# Altium PCB RatumnScanner_PcbDoc@20260328.pcbdoc (part 2 of 2)
Units mil, origin at the board's own origin, x right, y up, seen from the top; angles counter-clockwise.
Board outline 3937.01 x 983.86 mil, 6 copper layers (Top Layer, 内层1, 内层2, CONNECTION, IO_PINS, Bottom Layer), stack 62.125 mil thick; 143 components, 128 nets, 581 pads, 302 vias.
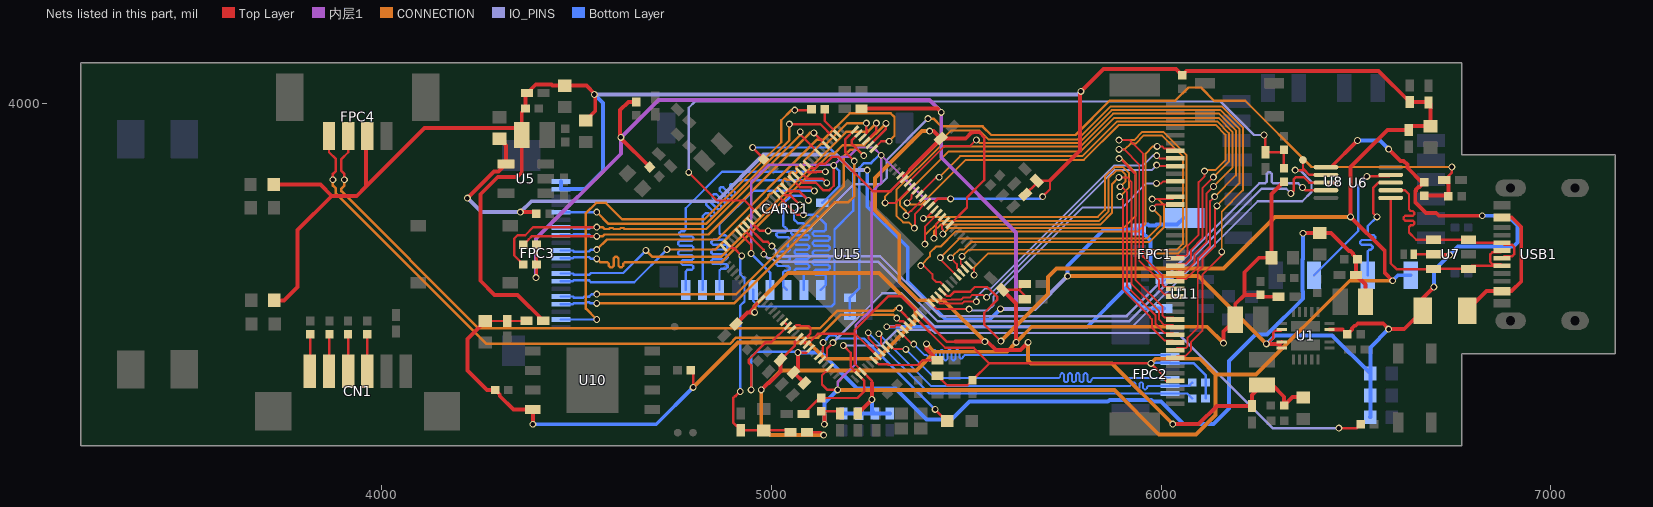
[diagram p5: the nets of this part, all layers, seen from the top]

## Via types
v1: diameter 17.72, hole 11.81, Top Layer to Bottom Layer, 302 vias

## Nets (pads, with @x,y where several pads share a name; then routed paths per layer and width w, separated by ;. In a path a pad name is that pad's centre, name@x,y a point inside that pad or via, vN(x,y) a via of type N, cw(c..) or ccw(c..) an arc to the next point about the centre after c; other vN are vias at no path point) (continued)
LCD_D4: FPC1.14 U15.92 | length 779.4
  Top Layer w5: v1(5433.52,3605.62) 5433.52,3600.95 U15.92@5477.19,3557.29 ; v1(5977.8,3731.76) 5987.92,3741.87 FPC1.14@6035.79,3741.87
  CONNECTION w5: v1(5433.52,3605.62) 5482,3654.09 5962.84,3654.09 5998.98,3690.23 5998.98,3710.58 v1(5977.8,3731.76)
LCD_D5: FPC1.13 U15.93 | length 784.4
  Top Layer w5: v1(5459.96,3605) 5476.21,3588.76 5476.21,3579.79 5486.93,3569.06 U15.93@5486.93,3567.03 ; v1(5977.12,3755.61) 6008,3755.61 6008.66,3756.26 6030.48,3756.26 FPC1.13@6035.79,3761.57
  CONNECTION w5: v1(5459.96,3605) 5464.94,3609.99 5465.85,3609.99 5482.01,3626.14 5493.79,3626.14 5512.72,3645.08 5969.08,3645.08 6008,3684 6008,3740 5992.39,3755.61 v1(5977.12,3755.61)
LCD_D6: FPC1.26 U15.94 | length 1500.6
  Top Layer w5: v1(5489.2,3608.8) 5485.95,3605.55 5485.95,3589.53 5496.67,3578.81 U15.94@5496.67,3576.78 ; v1(5892,3883.04) 5904.96,3883.04 5944,3844 5944,3597.47 5994.67,3546.8 5994.67,3524.97 6008.66,3510.98 6030.48,3510.98 FPC1.26@6035.79,3505.67
  CONNECTION w5: v1(5489.2,3608.8) 5505.97,3625.58 6040.58,3625.58 6055.94,3640.94 6055.94,3865.31 6002.27,3918.98 5955.73,3918.98 5934.48,3897.73 5921.73,3897.73 5907.04,3883.04 v1(5892,3883.04)
LCD_D7: FPC1.25 U15.95 | length 1527
  Top Layer w5: U15.95@5506.42,3586.52 5520.16,3572.78 v1(5520.16,3560.82) ; v1(5892,3906.74) 5919.26,3906.74 5954,3872 5954,3607.17 6003.69,3557.48 6003.69,3535.65 6008.66,3530.68 6030.48,3530.68 FPC1.25@6035.79,3525.37
  CONNECTION w5: v1(5520.16,3560.82) 5520.16,3580.41 5556.31,3616.56 6044.31,3616.56 6064.95,3637.2 6064.95,3869.05 6006,3928 5952,3928 5930.74,3906.74 v1(5892,3906.74)
LCD_D8: FPC1.24 U15.109 | length 1640.6
  Top Layer w5: v1(5367,3681) 5368,3682 5368,3717.16 U15.109@5399.24,3748.4 ; FPC1.24@6035.79,3545.07 6041.1,3550.38 6062.93,3550.38 6094.95,3582.4 6094.95,3604.23 6126,3635.28 6126,3750.66 v1(6137.34,3762)
  CONNECTION w5: v1(5367,3681) 5352.25,3695.75 5338.25,3695.75 5320.98,3713.02 5320.98,3778.98 5432,3890 5792,3890 5877.02,3975.02 6149.23,3975.02 6192.06,3932.19 6192.06,3816.72 v1(6137.34,3762)
LCD_D9: FPC1.23 U15.110 | length 1502.5
  Top Layer w5: v1(5345.43,3713.09) 5357.94,3725.6 5358.98,3725.6 5389.5,3756.11 U15.110@5389.5,3758.14 ; FPC1.23@6035.79,3564.77 6041.05,3570.03 6062.93,3570.03 6085.93,3593.04 6085.93,3614.91 6116,3644.98 6116,3769.47 v1(6134.41,3787.89)
  CONNECTION w5: v1(5345.43,3713.09) 5345.43,3724.45 5330,3739.89 5330,3752.32 5455.68,3878 5794,3878 5880.03,3964.03 6147.47,3964.03 6183.05,3928.45 6183.05,3836.52 v1(6134.41,3787.89)
LCD_D10: FPC1.22 U15.111 | length 1294.7
  Top Layer w5: U15.111@5379.75,3767.89 5423.61,3811.74 v1(5430.26,3811.74) ; FPC1.22@6035.79,3584.42 6041.05,3589.68 6062.93,3589.68 6076.92,3603.67 6076.92,3625.55 6106,3654.63 6106,3784 v1(6134,3812)
  CONNECTION w5: v1(5430.26,3811.74) 5484.53,3866 5798,3866 5887.02,3955.02 6143.73,3955.02 6174.03,3924.72 6174.03,3852.03 v1(6134,3812)
LCD_D11: FPC1.21 U15.112 | length 1351.8
  Top Layer w5: v1(5348.31,3746.1) 5359.29,3757.08 5359.29,3764.87 5370.01,3775.6 U15.112@5370.01,3777.63 ; FPC1.21@6035.79,3604.07 6041.1,3609.38 6062.93,3609.38 6067.9,3614.35 6067.9,3636.18 6096,3664.28 6096,3799.08 6111.43,3814.51 v1(6111.43,3827.47)
  CONNECTION w5: v1(5348.31,3746.1) 5351.9,3746.1 5356,3742 5385.05,3742 5499.05,3856 5802,3856 5892,3946 6140,3946 6165.02,3920.98 6165.02,3855.77 6139.25,3830 6113.96,3830 v1(6111.43,3827.47)
LCD_D12: FPC1.34 U15.113 | length 1834.1
  Top Layer w5: v1(5292,3746) 5318.89,3746 U15.113@5360.27,3787.37 ; FPC1.34@6035.79,3348.17 6041.1,3353.48 6062.93,3353.48 6076.92,3367.47 6076.92,3389.3 6106,3418.38 6106,3562 6155.58,3611.58 v1(6155.58,3620)
  CONNECTION w5: v1(5292,3746) 5292,3762.75 5461.25,3932 5534,3932 5557.97,3908.03 5784.53,3908.03 5869.55,3993.05 6156.7,3993.05 6210.09,3939.66 6210.09,3778.09 6155.58,3723.58 v1(6155.58,3620)
LCD_D13: FPC1.33 U15.114 | length 1604.1
  Top Layer w5: U15.114@5350.52,3797.12 5445.41,3892 5510.66,3892 v1(5526,3907.34) ; FPC1.33@6035.79,3367.87 6041.1,3373.18 6062.93,3373.18 6067.9,3378.15 6067.9,3399.98 6094,3426.08 6094,3568.7 6106,3580.7 6106,3602.53 6138,3634.53 6138,3732.96 v1(6143.34,3738.3)
  CONNECTION w5: v1(5526,3907.34) 5534.33,3899.02 5788.27,3899.02 5873.28,3984.03 6152.97,3984.03 6201.08,3935.92 6201.08,3796.04 v1(6143.34,3738.3)
LCD_D14: FPC1.32 U15.107 | length 1193
  Top Layer w5: v1(5390,3706) 5395.82,3706 U15.107@5418.73,3728.91 ; v1(5894,3762) 5902,3754 5902,3524 5972,3454 5972,3451.37 5976.64,3446.73 5976.64,3424.9 6008.66,3392.88 6030.48,3392.88 FPC1.32@6035.79,3387.57
  CONNECTION w5: v1(5390,3706) 5394,3710 5838,3710 5855.97,3727.97 5855.97,3812.91 5880.72,3837.67 5902.56,3837.67 5918,3822.23 5918,3786 v1(5894,3762)
LCD_D15: FPC1.31 U15.106 | length 1244.9
  Top Layer w5: v1(5394,3640) 5394,3684.69 U15.106@5428.47,3719.17 ; v1(5894.72,3787.25) 5898.75,3787.25 5912,3774 5912,3532 5952,3492 5952,3491.07 5985.66,3457.41 5985.66,3435.59 6008.66,3412.58 6030.48,3412.58 FPC1.31@6035.79,3407.27
  CONNECTION w5: v1(5394,3640) 5394,3662.75 5430.42,3699.17 5840.42,3699.17 5864.98,3723.73 5864.98,3809.18 5884.46,3828.65 5898.83,3828.65 5908.98,3818.49 5908.98,3801.51 v1(5894.72,3787.25)
LCD_D16: FPC1.30 U15.105 | length 1124.8
  Top Layer w5: v1(5417.24,3655.24) 5422.66,3660.66 5422.66,3691.83 5438.22,3707.39 U15.105@5438.22,3709.42 ; v1(5891.64,3811.31) 5912.69,3811.31 5924,3800 5924,3538.77 5994.67,3468.1 5994.67,3446.27 6008.66,3432.28 6030.48,3432.28 FPC1.30@6035.79,3426.97
  CONNECTION w5: v1(5417.24,3655.24) 5417.24,3673.24 5434.16,3690.16 5844.16,3690.16 5874,3720 5874,3793.67 v1(5891.64,3811.31)
LCD_D17: FPC1.29 U15.104 | length 1208
  Top Layer w5: v1(5440,3666) 5440,3677.13 5437.24,3679.89 5437.24,3688.95 U15.104@5447.96,3699.68 ; v1(5892,3859.34) 5894.66,3859.34 5934,3820 5934,3548.47 6003.69,3478.78 6003.69,3456.85 6008.66,3451.88 6030.58,3451.88 FPC1.29@6035.79,3446.67
  CONNECTION w5: v1(5440,3666) 5455.14,3681.14 5903.14,3681.14 5934,3712 5934,3824.75 5899.41,3859.34 v1(5892,3859.34)
LCD_DCLK: FPC1.11 U15.85 | length 785
  Top Layer w5: U15.85@5408.99,3489.09 5424.76,3473.31 v1(5507.57,3473.31) ; v1(5988.17,3795.97) 5999.97,3795.97 6004.97,3800.97 FPC1.11@6035.79,3800.97
  IO_PINS w5: v1(5507.57,3473.31) 5510.88,3470 5556.46,3470 5570,3483.54 5570,3506 5798,3734 5900,3734 5961.97,3795.97 v1(5988.17,3795.97)
LCD_DEN: FPC1.7 U15.89 | length 989.2
  Top Layer w5: v1(5383.25,3584.75) 5391.27,3584.75 5412.89,3563.14 5412.89,3553.05 5423.05,3542.89 5433.14,3542.89 U15.89@5447.96,3528.06 ; v1(5990,3890.77) 6002.87,3890.77 6008.66,3884.98 6030.48,3884.98 FPC1.7@6035.79,3879.67
  CONNECTION w5: v1(5383.25,3584.75) 5406.9,3608.41 5406.9,3617.65 5423.25,3634 5434,3634 5472.13,3672.13 5940.13,3672.13 5960.24,3692.24 5960.24,3747.96 5959.78,3748.42 5959.78,3762.79 5960.24,3763.26 5960.24,3872.24 5978.77,3890.77 v1(5990,3890.77)
LCD_HSYNC: FPC1.9 U15.87 | length 761.2
  Top Layer w5: U15.87@5428.47,3508.58 5430.51,3508.58 5441.23,3497.85 5446.27,3497.85 5446.74,3497.38 5462.24,3497.38 5462.86,3498 5487.25,3498 5492.27,3503.02 5508.61,3503.02 5515.6,3510 5542,3510 5548.13,3503.87 v1(5552.39,3503.87) ; v1(5988.39,3842.93) 5990.94,3840.37 FPC1.9@6035.79,3840.37
  IO_PINS w5: v1(5552.39,3503.87) 5553.87,3503.87 5880,3830 5975.46,3830 v1(5988.39,3842.93)
LCD_VSYNC: FPC1.8 U15.86 | length 788.1
  Top Layer w5: U15.86@5418.73,3498.83 5420.76,3498.83 5431.49,3488.11 5443.89,3488.11 5444,3488 5490,3488 5494.66,3492.66 v1(5526,3492.66) ; v1(5988.77,3867.07) 5995.87,3859.97 FPC1.8@6035.79,3859.97
  IO_PINS w5: v1(5526,3492.66) 5526,3504 5548,3526 5563.25,3526 5876.27,3839.02 5876.94,3839.02 5879.93,3842 5954,3842 5979.07,3867.07 v1(5988.77,3867.07)
MIPI/LVDS_CLK_N: FPC3.8 U15.125 | length 1042.7
  Top Layer w6.18: U15.125@5243.35,3904.29 5269.32,3930.27 v1(5269.32,3950.68)
  CONNECTION w6.18: v1(4678,3624) 4694,3608 4872.04,3608 5192.04,3928 5246.64,3928 v1(5269.32,3950.68)
  Bottom Layer w6.18: FPC3.8@4459.79,3564.66 4490.58,3564.66 4493.34,3561.91 4525.35,3561.91 4526.02,3561.24 4532.2,3561.24 4536.96,3566 4620,3566 v1(4678,3624)
MIPI/LVDS_CLK_P: FPC3.7 U15.126 | length 1041.4
  Top Layer w6.18: U15.126@5233.6,3914.04 5244.92,3925.35 5244.92,3934.07 5243.64,3935.35 v1(5243.64,3950.36)
  CONNECTION w6.18: v1(4732,3626.31) 4856.31,3626.31 4991.29,3761.29 4991.29,3765.18 4996.15,3770.03 5000.03,3770.03 5020.15,3790.15 5026.06,3790.15 5028.89,3792.98 5028.89,3802.78 5033.74,3807.63 5037.63,3807.63 5040.26,3805 5046.44,3805 5049,3807.56 5049,3813.74 5046.37,3816.37 5046.37,3820.26 5051.22,3825.11 5055.11,3825.11 5057.74,3822.48 5063.92,3822.48 5066.48,3825.04 5066.48,3831.22 5063.85,3833.85 5063.85,3837.74 5068.71,3842.6 5072.6,3842.6 5075.22,3839.97 5081.41,3839.97 5083.97,3842.53 5083.97,3853.97 5128,3898 5142,3898 5194.36,3950.36 v1(5243.64,3950.36)
  Bottom Layer w6.18: FPC3.7@4459.79,3544.97 4490.58,3544.97 4493.34,3547.73 4519.48,3547.73 4520.14,3547.06 4532.2,3547.06 4536.96,3542.3 4647.99,3542.3 v1(4732,3626.31)
MIPI/LVDS_D0_N: FPC3.5 U15.127 | length 1064
  Top Layer w6.18: U15.127@5223.86,3923.78 5206,3905.92 5206,3898 v1(5237,3867)
  CONNECTION w6.18: v1(4552,3511.64) 4909.13,3511.64 5186,3788.51 5186,3866 5202,3882 5222,3882 v1(5237,3867)
  Bottom Layer w6.18: FPC3.5@4459.79,3505.6 4490.58,3505.6 4493.33,3502.85 4517.76,3502.85 4520.14,3505.24 4532.2,3505.24 4538.6,3511.64 v1(4552,3511.64)
MIPI/LVDS_D0_P: FPC3.4 U15.128 | length 1060.3
  Top Layer w6.18: v1(5212.59,3853.21) 5190,3875.8 5190,3909.41 U15.128@5214.11,3933.53
  CONNECTION w6.18: v1(4552,3487.94) 4903.94,3487.94 5163.01,3747.01 5197.01,3747.01 5212.59,3762.59 v1(5212.59,3853.21)
  Bottom Layer w6.18: FPC3.4@4459.79,3485.92 4490.58,3485.92 4493.33,3488.68 4523.63,3488.68 4526.02,3491.06 4532.2,3491.06 4535.32,3487.94 v1(4552,3487.94)
MIPI/LVDS_D1_N: FPC3.11 U15.123 | length 1123.5
  Top Layer w6.18: U15.123@5262.83,3884.81 5282.03,3904 v1(5302,3904)
  CONNECTION w6.18: v1(4552,3626) 4578,3652 4861.13,3652 5117.33,3908.2 5133.56,3908.2 5201.36,3976 5306,3976 5316,3966 5316,3918 v1(5302,3904)
  Bottom Layer w6.18: FPC3.11@4459.79,3623.71 4490.58,3623.71 4493.33,3620.96 4519.87,3620.96 4520.14,3621.24 4532.2,3621.24 4536.96,3626 v1(4552,3626)
MIPI/LVDS_D1_P: FPC3.10 U15.124 | length 1123.5
  Top Layer w6.18: U15.124@5253.09,3894.55 5294,3935.46 v1(5294,3950)
  CONNECTION w6.18: v1(4552,3602.3) 4560.3,3594 4578.6,3594 4582.98,3589.63 4582.98,3584.37 4587.35,3580 4590.97,3580 4595.34,3584.37 4595.34,3603.63 4599.71,3608 4603.33,3608 4607.7,3603.63 4607.7,3584.76 4612.07,3580.39 4615.69,3580.39 4620.06,3584.76 4620.06,3589.63 4624.43,3594 4872.46,3594 5150.91,3872.45 5161.71,3872.45 5183.26,3894 5238,3894 v1(5294,3950)
  Bottom Layer w6.18: FPC3.10@4459.79,3604.03 4490.58,3604.03 4493.33,3606.79 4525.74,3606.79 4526.02,3607.06 4532.2,3607.06 4536.96,3602.3 v1(4552,3602.3)
MIPI/LVDS_MCLK0: FPC3.2 R9.2 | length 1134.1
  Top Layer w6.18: v1(5060,3984) 5100.96,3984 R9.2@5102.96,3986
  CONNECTION w6.18: v1(4552,3446.55) 4524,3474.55 4524,3719.51 4550.49,3746 4575,3746 4617,3704 4828,3704 5025.32,3901.32 5025.32,3958.06 5051.26,3984 v1(5060,3984)
  Bottom Layer w6.18: FPC3.2@4459.79,3446.55 v1(4552,3446.55)
MIPI/LVDS_RST: FPC3.16 U15.3 | length 856.7
  Top Layer w6.18: v1(5046,3948) 5125.45,3948 U15.3@5159.41,3914.04
  CONNECTION w6.18: v1(4552,3722.14) 4582.14,3692 4831.81,3692 5046,3906.19 v1(5046,3948)
  Bottom Layer w6.18: FPC3.16@4459.79,3722.14 v1(4552,3722.14)
MIPI_CLK: R9.1 U15.2 | length 75.5
  Top Layer w6.18: R9.1@5137.04,3986 5137.04,3955.9 U15.2@5169.16,3923.78
MIPI_I2C_SCL: FPC3.13 R48.1 U15.5 | length 1004.3
  Top Layer w6.18: v1(5109.12,3925.35) U15.5@5139.92,3894.55
  Top Layer w6.2: R48.1@4363.48,3638.17 4377.34,3652.03 4377.34,3652.56 4382.66,3657.88 4383.19,3657.88 4385.31,3660 v1(4552,3660)
  CONNECTION w6.18: v1(4552,3660) 4567.04,3660 4571.9,3664.86 4838.42,3664.86 5098.91,3925.35 v1(5109.12,3925.35)
  Bottom Layer w6.18: FPC3.13@4459.79,3663.08 4490.58,3663.08 4493.44,3665.94 4519.05,3665.94 4520.13,3664.86 4532.1,3664.86 4536.96,3660 v1(4552,3660)
MIPI_I2C_SDA: FPC3.14 R47.1 U15.7 | length 1104.4
  Top Layer w6.18: v1(5074,3928) 5074,3921.51 U15.7@5120.44,3875.07
  Top Layer w6.2: R47.1@4363.48,3587.97 4340,3611.45 4340,3654 4348.86,3662.86 4368.29,3662.86 4389.14,3683.7 v1(4552,3683.7)
  CONNECTION w6.18: v1(4552,3683.7) 4567.04,3683.7 4571.9,3678.84 4583.35,3678.84 4585.93,3681.42 4593.12,3681.42 4595.71,3678.84 4610.77,3678.84 4613.35,3681.42 4620.54,3681.42 4623.13,3678.84 4833.07,3678.84 5074,3919.77 v1(5074,3928)
  Bottom Layer w6.18: FPC3.14@4459.79,3682.77 4490.58,3682.77 4493.44,3679.92 4524.84,3679.92 4525.92,3678.84 4532.1,3678.84 4536.96,3683.7 v1(4552,3683.7)
NPOR: C6.2 R4.1 R23.1 U15.66 | length 1772.1
  Top Layer w6.2: C6.2@5082.41,3204.4 5123.35,3245.35 R4.1@5127.91,3245.35 5221.35,3245.35 5238,3262 5238,3289.82 U15.66@5223.86,3303.96 5223.86,3305.14 5203.78,3325.22 5203.78,3360.91 v1(5184.75,3379.94) ; v1(6456,3168) 6502.45,3168 R23.1@6512.33,3177.88
  IO_PINS w6.2: v1(5184.75,3379.94) 5281.94,3379.94 5322,3420 5412.45,3420 5420.45,3412 6042,3412 6286,3168 v1(6456,3168)
PWM_LCD: R46.2 U11.4 U15.78 | length 837.4
  Top Layer w6.2: v1(5296,3428) 5316.54,3428 5320.74,3432.2 5329.45,3432.2 U15.78@5340.78,3420.88
  Bottom Layer w10: v1(5296,3428) 5811.04,3428 R46.2@5914,3530.96 5914,3516 5955.29,3474.71 U11.4@6007.49,3474.71
RD+: CN1.2 R43.2 | length 95.7
  Top Layer w6.2: CN1.2@3864.76,3313.67 3866,3314.91 R43.2@3866,3408.83
RD-: CN1.1 R42.2 | length 95.6
  Top Layer w6.2: CN1.1@3815.55,3313.67 3816.49,3314.61 R42.2@3816.49,3408.83
RECOVERY: C8.2 R24.1 R25.1 U15.23 | length 2048.6
  Top Layer w6.18: C8.2@6267.74,3875.66 6308.15,3875.66 R24.1@6315.11,3882.63 R25.1@6315.11,3834.38
  Top Layer w6.2: v1(4788,3824) 4860,3752 4931.71,3752 U15.23@4964.54,3719.17 ; v1(6264,3920) 6267.74,3916.26 C8.2@6267.74,3875.66
  IO_PINS w6.2: v1(4788,3824) 4788,3990 4804,4006 6152,4006 6238,3920 v1(6264,3920)
SDMMC0_CLK: CARD1.5 R10.2 | length 929
  Top Layer w6.18: v1(4952,3888) 4979.95,3860.05 R10.2@4979.95,3858.05
  Bottom Layer w6.18: v1(4952,3888) 5148,3888 5210,3826 5210,3726 5162,3678 5162,3488 5154,3480 4968,3480 4953.53,3494.47 CARD1.5@4953.53,3522.57
SDMMC0_CMD: CARD1.3 U15.16 | length 570.6
  Top Layer w6.18: U15.16@5032.75,3787.37 5033.95,3787.37 5045.26,3776.06 5071.3,3776.06 v1(5094.98,3752.38)
  Bottom Layer w6.18: CARD1.3@5040.14,3522.57 5030,3532.71 5030,3567.3 5034.37,3571.67 5042.85,3571.67 5047.22,3576.04 5047.22,3579.66 5042.85,3584.03 5017.15,3584.03 5012.78,3588.4 5012.78,3592.02 5017.15,3596.4 5042.85,3596.4 5047.22,3600.77 5047.22,3604.39 5042.85,3608.76 5017.15,3608.76 5012.78,3613.13 5012.78,3616.75 5017.15,3621.12 5042.85,3621.12 5047.22,3625.49 5047.22,3629.11 5041.87,3634.46 5041.87,3644.87 5047.22,3650.22 5047.22,3653.84 5042.85,3658.21 5017.15,3658.21 5012.78,3662.58 5012.78,3666.2 5017.15,3670.57 5035.63,3670.57 5040,3674.94 5040,3678.56 5035.63,3682.93 5034.37,3682.93 5030,3687.3 5030,3744 5050,3764 5083.36,3764 v1(5094.98,3752.38)
SDMMC0_D0: CARD1.7 U15.14 | length 764.4
  Top Layer w6.18: U15.14@5052.24,3806.86 5072.84,3786.25 5100.38,3786.25 v1(5110.29,3776.35)
  Bottom Layer w6.18: CARD1.7@4866.91,3522.57 4866.91,3572.44 4871.28,3576.81 4883.22,3576.81 4887.59,3581.18 4887.59,3584.8 4883.22,3589.17 4850.6,3589.17 4846.23,3593.54 4846.23,3597.16 4850.6,3601.53 4883.22,3601.53 4887.59,3605.9 4887.59,3609.53 4883.22,3613.9 4850.6,3613.9 4846.23,3618.27 4846.23,3621.89 4850.6,3626.26 4883.22,3626.26 4887.59,3630.63 4887.59,3634.25 4883.22,3638.62 4850.6,3638.62 4846.23,3642.99 4846.23,3646.61 4850.6,3650.98 4881.81,3650.98 4886.18,3655.35 4886.18,3658.97 4881.81,3663.35 4871.28,3663.35 4866.91,3667.72 4866.91,3690.91 4952.57,3776.57 5085.07,3776.57 5085.97,3777.47 5109.17,3777.47 v1(5110.29,3776.35)
SDMMC0_D1: CARD1.8 U15.12 | length 874.4
  Top Layer w6.18: U15.12@5071.72,3826.35 5072.92,3826.35 5091.07,3808.2 5131.28,3808.2 v1(5142.07,3797.41)
  Bottom Layer w6.2: CARD1.8@4823.6,3522.57 4823.6,3711.61 4831.36,3719.36 4837.56,3719.36 4845.26,3711.65 4851.46,3711.65 4854.03,3714.22 4854.03,3720.42 4832.42,3742.03 4832.42,3748.23 4834.99,3750.8 4841.19,3750.8 4862.8,3729.19 4869,3729.19 4871.57,3731.75 4871.57,3737.95 4849.95,3759.57 4849.95,3765.77 4852.52,3768.34 4858.72,3768.34 4880.34,3746.72 4886.54,3746.72 4889.1,3749.29 4889.1,3755.49 4867.49,3777.1 4867.49,3783.3 4870.06,3785.87 4876.26,3785.87 4897.87,3764.26 4904.07,3764.26 4906.64,3766.83 4906.64,3773.03 4894.27,3785.4 4894.27,3791.6 4896.84,3794.17 4906.17,3794.17 4916,3804 5135.48,3804 v1(5142.07,3797.41)
SDMMC0_D2: CARD1.1 U15.18 | length 694.6
  Top Layer w6.18: U15.18@5013.26,3767.89 5065.65,3715.49 v1(5082.27,3715.49)
  Bottom Layer w6.2: v1(5082.27,3715.49) 5114.51,3715.49 5140,3690 5140,3677.8 5135.62,3673.42 5110.38,3673.42 5106,3669.03 5106,3665.4 5110.38,3661.02 5145.59,3661.02 5149.98,3656.63 5149.98,3653 5145.59,3648.62 5110.38,3648.62 5106,3644.23 5106,3640.6 5110.38,3636.22 5145.59,3636.22 5149.98,3631.83 5149.98,3628.2 5145.59,3623.82 5110.38,3623.82 5106,3619.43 5106,3615.8 5110.38,3611.42 5145.59,3611.42 5149.98,3607.03 5149.98,3603.4 5145.59,3599.02 5110.38,3599.02 5106,3594.63 5106,3591 5110.38,3586.62 5145.59,3586.62 5149.98,3582.23 5149.98,3578.6 5145.59,3574.22 5113.27,3574.22 5108.89,3569.83 5108.89,3566.2 5113.27,3561.82 5135.62,3561.82 5140,3557.43 5140,3535.81 CARD1.1@5126.75,3522.57
SDMMC0_D3: CARD1.2 U15.17 | length 658.2
  Top Layer w6.18: U15.17@5023,3777.63 5024.2,3777.63 5035.97,3765.86 5047.98,3765.86 v1(5073.29,3740.56)
  Bottom Layer w6.18: v1(5073.29,3740.56) 5073.29,3736.93 5058,3721.65 5058,3703.63 5067.52,3694.12 5081.64,3694.12 5087.82,3687.93 5098.11,3687.93 5102.48,3683.56 5102.48,3679.94 5098.11,3675.57 5055.36,3675.57 5050.99,3671.2 5050.99,3667.58 5055.36,3663.21 5092.7,3663.21 5097.07,3658.84 5097.07,3655.22 5092.7,3650.85 5063.6,3650.85 5059.23,3646.48 5059.23,3642.86 5063.6,3638.49 5092.7,3638.49 5097.07,3634.11 5097.07,3630.49 5092.7,3626.12 5063.6,3626.12 5059.23,3621.75 5059.23,3618.13 5063.6,3613.76 5092.7,3613.76 5097.07,3609.39 5097.07,3605.77 5092.7,3601.4 5063.6,3601.4 5059.23,3597.03 5059.23,3593.41 5063.6,3589.04 5092.7,3589.04 5097.07,3584.67 5097.07,3581.05 5092.7,3576.67 5063.6,3576.67 5059.23,3572.3 5059.23,3568.68 5063.6,3564.31 5079.08,3564.31 5083.45,3559.94 CARD1.2@5083.45,3522.57
SDMMC0_DET: CARD1.9 U15.11 | length 915.2
  Top Layer w6.18: U15.11@5081.47,3836.09 5091.82,3825.74 5093.02,3825.74 5093.98,3824.78 5099.02,3824.78 5099.49,3824.31 5115.47,3824.31 5116.91,3825.74 v1(5138.68,3825.74)
  Bottom Layer w6.18: CARD1.9@4780.3,3522.57 4780.3,3569.87 4784.67,3574.24 4795.52,3574.24 4799.89,3578.61 4799.89,3582.23 4795.52,3586.61 4772.78,3586.61 4768.41,3590.98 4768.41,3594.6 4772.78,3598.97 4795.52,3598.97 4799.89,3603.34 4799.89,3606.96 4795.52,3611.33 4765.07,3611.33 4760.7,3615.7 4760.7,3619.32 4765.07,3623.69 4795.52,3623.69 4799.89,3628.06 4799.89,3631.68 4795.52,3636.05 4765.07,3636.05 4760.7,3640.43 4760.7,3644.05 4765.07,3648.42 4795.52,3648.42 4799.89,3652.79 4799.89,3656.41 4795.52,3660.78 4768.24,3660.78 4763.87,3665.15 4763.87,3668.77 4768.24,3673.14 4775.93,3673.14 4780.3,3677.51 4780.3,3732.3 4873.74,3825.74 v1(5138.68,3825.74)
SOC_USB_DN: U6.4 U15.26 | length 1787.3
  Top Layer w6.18: U15.26@4935.31,3689.93 4935.46,3689.93 4979.69,3645.69 4990.69,3645.69 v1(5001.33,3635.06) ; v1(6362.75,3785.25) 6369.69,3778.31 U6.4@6422.93,3778.31
  IO_PINS w6.18: v1(5001.33,3635.06) 5011.96,3624.43 5011.96,3613.43 5016.33,3609.06 5278.94,3609.06 5432.62,3455.38 5911.38,3455.38 6252,3796 6266.79,3796 6271.16,3800.37 6271.16,3820.58 6275.53,3824.95 6279.16,3824.95 6283.53,3820.58 6283.53,3800.37 6287.9,3796 6352,3796 v1(6362.75,3785.25)
SOC_USB_DP: U6.3 U15.27 | length 1788.8
  Top Layer w6.18: U15.27@4925.57,3680.2 4925.57,3680.05 4980.45,3625.18 v1(4980.45,3614.18) ; v1(6333.06,3770) 6340,3776.94 6340,3806 6346,3812 6366,3812 6380,3798 U6.3@6422.93,3798
  IO_PINS w6.18: v1(4980.45,3614.18) 4991.08,3603.55 5002.08,3603.55 5010.54,3595.08 5273.6,3595.08 5426.96,3441.72 5917.49,3441.72 6257.79,3782.02 6321.03,3782.02 v1(6333.06,3770)
TD+: CN1.4 R56.2 | length 95.1
  Top Layer w6.2: CN1.4@3963.19,3313.67 R56.2@3963.23,3408.83
TD-: CN1.3 R55.2 | length 95.4
  Top Layer w6.2: R55.2@3913.49,3408.83 3913.97,3408.35 CN1.3@3913.97,3313.67
TP_INT: FPC2.3 U15.74 | length 903.2
  Top Layer w5: U15.74@5301.8,3381.9 5303.84,3381.9 5314.56,3371.18 5343.98,3371.18 v1(5345.21,3369.94)
  Bottom Layer w5: v1(5345.21,3369.94) 5419,3296.16 5737.63,3296.16 5741.17,3299.7 5741.17,3305.42 5744.71,3308.95 5747.63,3308.95 5751.17,3305.42 5751.17,3289.4 5754.71,3285.87 5757.63,3285.87 5761.17,3289.4 5761.17,3305.42 5764.71,3308.95 5767.63,3308.95 5771.17,3305.42 5771.17,3289.4 5774.71,3285.87 5777.63,3285.87 5781.17,3289.4 5781.17,3305.42 5784.71,3308.95 5787.63,3308.95 5791.17,3305.42 5791.17,3289.4 5794.71,3285.87 5797.63,3285.87 5801.17,3289.4 5801.17,3305.42 5804.71,3308.95 5807.63,3308.95 5811.17,3305.42 5811.17,3289.7 5814.71,3286.16 5817.63,3286.16 5821.17,3289.7 5821.17,3292.62 5824.71,3296.16 FPC2.3@6022.69,3296.16
TP_RST: FPC2.6 U15.77 | length 902.4
  Top Layer w5: U15.77@5331.03,3411.14 5333.07,3411.14 5360.87,3383.34 v1(5365.34,3383.34)
  Bottom Layer w5: v1(5365.34,3383.34) 5393.46,3355.21 5398.62,3355.21 5402.15,3351.67 5402.15,3345.54 5405.69,3342 5408.62,3342 5412.15,3345.54 5412.15,3364.88 5415.69,3368.42 5418.62,3368.42 5422.15,3364.88 5422.15,3345.54 5425.69,3342 5428.62,3342 5432.15,3345.54 5432.15,3364.88 5435.69,3368.42 5438.62,3368.42 5442.15,3364.88 5442.15,3345.54 5445.69,3342 5448.62,3342 5452.15,3345.54 5452.15,3364.88 5455.69,3368.42 5458.62,3368.42 5462.15,3364.88 5462.15,3345.54 5465.69,3342 5468.62,3342 5472.15,3345.54 5472.15,3364.88 5475.69,3368.42 5478.62,3368.42 5482.15,3364.88 5482.15,3349.91 5485.69,3346.38 5488.62,3346.38 5492.15,3349.91 5492.15,3351.67 5495.69,3355.21 FPC2.6@6022.69,3355.21
TP_SCL: FPC2.1 R40.2 U15.72 | length 965.4
  Top Layer w5: v1(5248.69,3412.69) 5248.69,3398.08 5282.31,3364.45 U15.72@5282.31,3362.42
  Bottom Layer w5: v1(5248.69,3412.69) 5404.58,3256.79 FPC2.1@6022.69,3256.79
  Bottom Layer w6.2: FPC2.1@6022.69,3256.79 6067.08,3256.79 R40.2@6079.97,3243.9
TP_SDA: FPC2.2 R41.2 U15.73 | length 960.4
  Top Layer w5: v1(5275.86,3410.04) 5281.33,3404.57 5281.33,3384.92 5292.06,3374.19 U15.73@5292.06,3372.16
  Bottom Layer w5: v1(5275.86,3410.04) 5409.43,3276.47 5920.52,3276.47 5924.06,3280.01 5924.06,3282.14 5927.59,3285.68 5930.52,3285.68 5934.06,3282.14 5934.06,3270.81 5937.59,3267.27 5940.52,3267.27 5944.06,3270.81 5944.06,3282.14 5947.59,3285.68 5950.52,3285.68 5954.06,3282.14 5954.06,3270.81 5957.59,3267.27 5960.52,3267.27 5964.06,3270.81 5964.06,3272.93 5967.59,3276.47 FPC2.2@6022.69,3276.47
  Bottom Layer w6.2: FPC2.2@6022.69,3276.47 6071.6,3276.47 R41.2@6079.97,3284.84
TYPEC_DN: U6.6 U7.1 U7.6 USB1.5 USB1.7 | length 552.5
  Top Layer w6.18: U6.6@6589.07,3758.63 6589.07,3590.93 6604,3576 6698.04,3576 U7.6@6698.71,3576.67 U7.1@6788.87,3576.67 6796.55,3584.35 USB1.5@6875.16,3584.35 6870.46,3589.05 6849.75,3589.05 6844.44,3594.36 6844.44,3613.69 6849.75,3619.01 6870.45,3619.01 USB1.7@6875.16,3623.72
TYPEC_DP: U6.7 U7.3 U7.4 USB1.6 USB1.8 | length 552
  Top Layer w6.18: U6.7@6589.07,3778.31 6625.69,3778.31 6636,3768 6636,3729.5 6640.37,3725.13 6645.63,3725.13 6650,3720.76 6650,3717.14 6645.63,3712.77 6626.37,3712.77 6622,3708.4 6622,3704.78 6626.37,3700.41 6645.63,3700.41 6650,3696.04 6650,3692.42 6645.63,3688.05 6640.37,3688.05 6636,3683.68 6636,3670 6654.53,3651.47 U7.4@6698.71,3651.47 U7.3@6788.87,3651.47 6796.94,3643.4 USB1.8@6875.16,3643.4 6879.86,3638.7 6900.58,3638.7 6905.89,3633.38 6905.89,3614.05 6900.58,3608.74 6879.87,3608.74 USB1.6@6875.16,3604.03
UART2_RX: FPC4.3 U15.80 | length 1802.9
  Top Layer w6.2: v1(3904.34,3805.18) 3904.34,3820.23 3896.58,3828 3896.58,3858.37 3914.18,3875.97 FPC4.3@3914.18,3917.61 ; v1(5328.57,3475.66) 5328.57,3472.06 U15.80@5360.27,3440.37
  CONNECTION w6.2: v1(3904.34,3805.18) 3904.34,3790.12 3896.58,3782.35 3896.58,3776.15 4248.73,3424 5124,3424 5169.46,3469.46 5313.36,3469.46 5319.56,3475.66 v1(5328.57,3475.66)
UART2_TX: FPC4.4 U15.79 | length 1832
  Top Layer w6.2: FPC4.4@3864.97,3917.61 3864.97,3875.97 3882.58,3858.37 3882.58,3828 3874.81,3820.23 v1(3874.81,3805.18) ; v1(5321.75,3450.15) 5329.48,3442.42 5337.54,3442.42 5349.34,3430.62 U15.79@5350.52,3430.62
  CONNECTION w6.2: v1(3874.81,3805.18) 3874.81,3790.12 3882.58,3782.35 3882.58,3770.35 4268.93,3384 4893.49,3384 4909.61,3400.12 5119.91,3400.12 5179.03,3459.24 5312.66,3459.24 v1(5321.75,3450.15)
USB_CTRL: TP1.1 U6.2 U15.59 | length 1708.2
  Top Layer w6.18: U15.59@5130.18,3342.94 5131.38,3342.94 5142.69,3354.25 5142.69,3372.15 v1(5157.74,3387.2) ; v1(6344,3830) 6368,3830 ; TP1.1@6364,3856 6364,3834 6368,3830 ; U6.2@6422.93,3817.68 6380.32,3817.68 6368,3830
  IO_PINS w6.18: v1(5157.74,3387.2) 5284.54,3514 5334,3514 5420,3428 5926,3428 6248,3750 6362,3750 6386,3774 6386,3800 6356,3830 v1(6344,3830)
USB_DET_IN: C58.2 R27.1 R28.2 U15.25 | length 2260.5
  Top Layer w6.2: U15.25@4945.05,3699.68 4970.73,3674 v1(4992,3674) ; C58.2@6726.65,3804.82 6746,3824.17 v1(6746,3838)
  Top Layer w10: R27.1@6675.24,3764.42 6735.32,3764.42 R28.2@6737.09,3762.65 6737.09,3794.38 C58.2@6726.65,3804.82
  CONNECTION w6.2: v1(5402,3962) 5416,3962 5436,3942 5542,3942 5564,3920 5780,3920 5868,4008 6036,4008 6070,4042 6102,4042 6136,4008 6216,4008 6386,3838 v1(6746,3838)
  IO_PINS w6.2: v1(4992,3674) 5092,3674 5212,3794 5280,3794 5296,3810 5296,3856 v1(5402,3962)
VBUS: F1.1 USB1.2 USB1.11 | length 368.5
  Top Layer w10: F1.1@6785.28,3469.5 6835.17,3519.39 USB1.2@6875.16,3519.39 6899.39,3519.39 6924,3544 6924,3684 6899.63,3708.37 USB1.11@6875.16,3708.37
VCC1V8_CODEC: C16.2 C17.2 L2.2 U15.31 | length 654.7
  Top Layer w6.2: U15.31@4886.6,3641.22 4887.78,3641.22 4899.11,3629.9 4904.1,3629.9 v1(4924,3610) ; v1(4920.1,3261.9) 4908.2,3250 4906.38,3250 4902,3245.62 4902,3224.79 4901.9,3224.7 4901.9,3182.17 C17.2@4921.62,3162.46 5043.73,3162.46 L2.2@5048.8,3157.39
  Bottom Layer w6.2: v1(4920.1,3261.9) 4920.1,3482.2 4931.11,3493.21 4931.11,3551.92 4920.1,3562.94 4920.1,3606.1 v1(4924,3610)
VCC1V8_MICBIAS: U15.32
VCC_1V8: C14.2 C15.2 C37.1 C38.1 C42.2 C43.1 L1.2 L2.1 L4.2 L6.1 R6.2 R11.2 R15.2 R25.2 R47.2 R48.2 U15.53 U15.70 | length 5358.2
  Top Layer w6.2: v1(4396,3554) 4397.56,3555.56 R47.2@4397.56,3587.97 R48.2@4397.56,3638.17 ; C14.2@5023.17,3343.17 5060.4,3380.4 5060.4,3388.88 5071.72,3400.21 U15.53@5071.72,3401.39 ; L2.1@5091.72,3157.39 5126.61,3157.39 v1(5134,3150) ; U15.70@5262.83,3342.94 5264,3342.94 5275.34,3331.6 5298.4,3331.6 5300,3330 5376,3330 5388.01,3342.01 C15.2@5426.75,3342.01 ; L4.2@5593.17,3522.83 5635.1,3522.83 ; C38.1@5650.04,3498.82 5650.04,3507.88 5635.1,3522.83 ; C37.1@5650.04,3537.77 5635.1,3522.83
  Top Layer w10: R11.2@4653.27,4004.89 4632.89,4004.89 4612,3984 4612,3914 R6.2@4687.95,3838.05 ; v1(4974,3266) 4991.33,3283.33 4993.89,3283.33 5023.17,3312.61 C14.2@5023.17,3343.17 ; L1.2@5231.31,3987.71 5426.29,3987.71 v1(5436,3978) ; v1(5398,3384) 5398,3370.75 C15.2@5426.75,3342.01 ; L4.2@5593.17,3522.83 5628,3488 v1(5628,3387.84) ; v1(6160,3386) 6160,3415.56 L6.1@6190.28,3445.84 6190.28,3486.28 6214.02,3510.02 ; C42.2@6301.47,3505.06 6259.89,3505.06 R15.2@6254.93,3510.02 6214.02,3510.02 ; R25.2@6315.11,3800.3 6283.37,3768.56 C43.1@6283.37,3605.06 6251.06,3605.06 6214.02,3568.02 6214.02,3510.02
  内层1 w10: v1(4396,3554) 4396,3654 4614,3872 v1(4614,3914) 4710,4010 5406,4010 v1@5436,3980 ; v1(5436,3978) 5436,3862 5628,3670 v1(5628,3387.84)
  CONNECTION w10: v1(5134,3150) 4998,3150 4974,3174 v1(4974,3266) 5024,3316 5372,3316 5420,3364 ; v1(5398,3384) 5418,3364 5420,3364 ; v1(6160,3386) 6118,3428 5668.16,3428 v1(5628,3387.84) 5604.16,3364 5420,3364
VCC_3V3: C10.1 C13.1 C29.2 C33.2 C34.2 C35.2 C50.1 C52.2 C53.2 C56.2 C57.2 C75.2 C76.2 CARD1.4 FPC1.37 FPC2.5 FPC3.19 FPC3.20 FPC4.2 L3.1 L8.1 L9.1 R4.2 R20.2 R26.2 R32.2 R34.2 R39.2 R40.1 R41.1 U8.11 U15.13 U15.28 U15.61 U15.81 U15.88 U15.108 | length 13210.8
  Top Layer w6.18: U15.13@5061.98,3816.61 5080.59,3798 5114,3798 5134,3778 5148,3778 5160,3790 v1(5160,3842)
  Top Layer w6.2: U15.28@4915.83,3670.45 4948,3638.28 v1(4948,3616) ; R4.2@5127.91,3211.27 5170.19,3211.27 C35.2@5176,3205.46 ; U15.61@5149.67,3323.45 5130,3303.78 5130,3280 5144,3266 v1(5170,3266) ; U15.81@5370.01,3450.11 5446.12,3374 5518.96,3374 5558.96,3334 ; U15.108@5408.99,3738.65 5426.33,3756 v1(5460,3756) ; C34.2@5426.54,3302 5450.54,3278 5502.96,3278 R26.2@5516,3291.04 5558.96,3334 ; U15.88@5438.22,3518.32 5439.4,3518.32 5450.73,3506.99 5458.25,3506.99 5469.58,3518.32 5510.32,3518.32 5522,3530 5554,3530 5580,3504 5580,3497.8 5546.1,3463.9 5546.1,3433.9 v1(5589,3391) ; L3.1@5651.17,3767.17 5681.17,3797.17 C29.2@5681.17,3802.83 5714.83,3802.83 5714.83,3780.83 v1(5696,3762) ; FPC1.37@6035.79,3289.17 6013.12,3289.17 6003.09,3299.21 6003.09,3304.91 v1(5974,3334) 5558.96,3334
  Top Layer w10: R34.2@3722.79,3793.15 3842.85,3793.15 3872,3764 ; R32.2@3724.8,3495.91 3749.91,3495.91 3784,3530 3784,3676 3872,3764 ; FPC4.2@3963.39,3917.61 3960,3914.21 3960,3788 ; L9.1@4414.78,3443.4 4348.18,3510 4290,3510 4254,3546 4254,3768 4298,3812 4348,3812 4359.4,3823.4 L8.1@4359.4,3920 ; C50.1@4523.64,3957.39 4548,3981.75 4548,4024 4525.23,4046.77 C53.2@4469.64,4046.77 4438.41,4046.77 4435.56,4049.61 4395.36,4049.61 4373.74,4028 C52.2@4372.54,4028 4368.96,4024.42 R20.2@4368.96,3988 4359.4,3978.44 L8.1@4359.4,3920 ; R4.2@5127.91,3211.27 5136,3203.17 v1(5136,3178) ; 5714.83,3802.83 5792,3880 5792,4029.19 5852,4089.19 6037.85,4089.19 R39.2@6054,4073.04 6064.96,4084 6558.27,4084 C76.2@6637.94,4004.33 6685.23,4004.33 C75.2@6686.13,4003.43 6691.58,3997.98 C56.2@6691.58,3942.81 6645.48,3942.81 C57.2@6635.36,3932.7 6580.7,3932.7 6486,3838 v1(6486,3710) 6574,3622 6574,3566 v1(6594,3546) ; 3872,3764 3936,3764 3960,3788 ; 3960,3788 4110,3938 4341.4,3938 L8.1@4359.4,3920
  内层1 w6.2: v1(4948,3616) 4948,3798 4994,3844 5158,3844 v1(5160,3842) 5182,3864 5198,3864 5222,3888 5262,3888 v1(5282,3868) ; v1(5170,3266) 5170,3286 5216,3332 5216,3432 5258,3474 5258,3774 5282,3798 v1(5282,3868) ; v1(5460,3756) 5394,3756 v1(5282,3868)
  CONNECTION w10: v1(5170,3266) 5880,3266 5994,3152 6090,3152 6140,3202 6140,3306 ; v1(5589,3391) 5710,3512 5710,3556 5732,3578 6160,3578 6292,3710 v1(6486,3710) ; v1(5974,3334) 5986,3346 6100,3346 6140,3306 ; v1(6594,3546) 6484,3546 6244,3306 6140,3306
  IO_PINS w10: v1(4546,4024) 5786,4024 v1(5794,4032)
  Bottom Layer w6.18: C33.2@5130.54,3746 5174,3789.46 5174,3828 v1(5160,3842)
  Bottom Layer w6.2: v1(4948,3616) 4996.83,3567.17 CARD1.4@4996.83,3522.57 ; C10.1@5201.35,3456.06 C13.1@5201.35,3502.71 5226,3527.36 5226,3836 5238,3848 5256,3848 5276,3868 v1(5282,3868) ; v1(5460,3756) 5690,3756 v1(5696,3762) ; v1(5974,3334) 5975.53,3335.53 FPC2.5@6022.69,3335.53 6024.22,3334 6084,3334 6114.05,3303.95 R41.1@6114.05,3284.84 R40.1@6114.05,3243.9
  Bottom Layer w10: FPC3.20@4459.79,3800.88 FPC3.19@4459.79,3781.2 4521.2,3781.2 4568,3828 4568,4002 v1(4546,4024) ; v1(5136,3178) 5136,3232 v1(5170,3266) ; v1(6594,3546) 6608.24,3560.24 U8.11@6640.46,3560.24
VCC_5V: C47.2 C48.2 C49.2 C51.2 C64.2 D1.2 F1.2 L10.1 R19.2 R22.2 R27.2 U1.7 U1.9 U1.10 U1.19 U5.4 U6.1 U7.5 U11.6 | length 5422.5
  Top Layer w6.18: D1.2@6648.15,3614.07 U7.5@6698.71,3614.07
  Top Layer w6.2: v1@6272.84,3384 6287.53,3398.69 6287.53,3412.81 6292.85,3418.13 6306.97,3418.13 U1.7@6309.7,3420.86
  Top Layer w10: v1(4220,3758) 4288.02,3826.02 4299.43,3826.02 U5.4@4318.81,3845.4 4318.81,3893.62 C51.2@4302,3910.44 ; v1(4356,3722) 4392.96,3722 R22.2@4396.96,3718 ; v1@6272.84,3384 6304.34,3384 ; U1.10@6309.71,3373.61 6304.34,3378.99 6304.34,3384 ; U1.9@6309.7,3389.36 6304.34,3384 ; U6.1@6422.93,3837.37 6435.37,3837.37 v1(6504,3906) ; U1.19@6431.75,3420.86 6466.09,3420.86 ; R19.2@6477.89,3409.06 6489.85,3421.02 6489.85,3424.24 6496.28,3430.68 6499.5,3430.68 6504.82,3436 6570,3436 v1(6584,3422) 6624,3422 F1.2@6671.5,3469.5 6671.5,3501.5 v1(6700,3530) ; v1(6584,3884) 6614.13,3853.87 6622.28,3853.87 6631.94,3844.2 6631.94,3836.06 6669.5,3798.5 R27.2@6675.24,3798.5 6663.28,3786.54 6660.06,3786.54 6653.63,3780.11 6653.63,3776.89 6652,3775.26 6652,3748 6680,3720 6706,3720 6713.07,3712.93 v1(6824,3712.93) ; U7.5@6698.71,3614.07 6700.78,3612 v1(6740,3612)
  CONNECTION w10: v1(5760,3558) 6096,3558 v1(6270,3384)
  IO_PINS w10: v1(4220,3758) 4256,3722 v1(4356,3722) 4384,3750 4860,3750 4980,3870 5166,3870 5206,3830 v1(5246,3830) ; v1(5588,3474) 5676,3474 v1(5760,3558)
  Bottom Layer w10: v1(5246,3830) 5246,3736 5350,3632 5350,3544 5448,3446 5560,3446 v1(5588,3474) ; v1(5760,3558) 5760,3584 5853.56,3677.56 C64.2@5944,3677.56 ; U11.6@6007.49,3549.51 6007.49,3552.77 5972.7,3587.56 5972.7,3648.86 C64.2@5944,3677.56 ; L10.1@6058,3707.15 6040.85,3690 5988.2,3690 5985.81,3687.61 5969.37,3687.61 5966.98,3690 5956.44,3690 C64.2@5944,3677.56 ; v1(6270,3384) 6292,3406 6439,3406 C47.2@6536.91,3308.09 ; v1(6504,3906) 6562,3906 v1(6584,3884) ; C49.2@6536.44,3196 6536.91,3196.47 C47.2@6536.91,3308.09 ; v1(6584,3422) 6536.91,3374.91 C47.2@6536.91,3308.09 ; v1(6700,3530) 6700,3572 v1(6740,3612) 6762,3634 6904,3634 6914,3644 6914,3688 6889.07,3712.93 v1(6824,3712.93)
VCC_DDR: C11.2 C12.2 C44.2 C45.1 L7.1 R17.2 U15.49 U15.50 U15.56 | length 2636.7
  Top Layer w6.2: v1(4948,3266) 4948,3329.31 4941.48,3335.83 4941.48,3343.36 4986.64,3388.52 5000.39,3388.52 U15.50@5042.49,3430.62 U15.49@5032.75,3440.37 ; v1(5068,3362) 5079.76,3362 5080.92,3360.84 5089.63,3360.84 U15.56@5100.96,3372.16
  Top Layer w10: C11.2@5056.92,3310.93 5057.43,3310.93 C12.2@5084.93,3283.43 ; 5068,3322.01 v1(5068,3362) ; v1(6364,3668) 6364.62,3668.62 C45.1@6406.93,3668.62 6436.41,3668.62 6482.35,3622.68 6485.57,3622.68 6492.01,3616.24 6492.01,3613.02 R17.2@6503.97,3601.06 6500.39,3597.48 C44.2@6500.39,3561.06 6524.6,3536.85 L7.1@6524.6,3492
  Bottom Layer w6.2: v1(4948,3266) 4948,3350 4962,3364 5066,3364 v1(5068,3362)
  Bottom Layer w10: v1(5068,3362) 5128,3362 5220,3270 5318,3270 5398,3190 5462,3190 5508,3236 5863.16,3236 cw(c5872.1,3229.62) 5872.1,3240.6 5970.52,3240.6 cw(c5970.52,3229.62) 5979.46,3236 6000,3236 6057.84,3178.16 6134.16,3178.16 6174,3218 6174,3340 6242,3408 6272,3408 6364,3500 6364,3519.2 6362.94,3520.26 6362.94,3600.23 6364,3601.29 v1(6364,3668)
VCC_FLASH: C31.2 C62.2 C63.2 L9.2 R37.2 R38.2 U10.8 U15.43 | length 2313.6
  Top Layer w5: 4940.26,3464.81 U15.43@4974.28,3498.83
  Top Layer w6.2: C62.2@4266.07,3442.85 4371.31,3442.85 L9.2@4371.86,3443.4 ; R37.2@4793.36,3316.2 4799.12,3310.44 v1(4799.12,3272.49)
  Top Layer w10: C62.2@4266.07,3442.85 4220,3396.78 4220,3316 4270,3266 R38.2@4291.14,3266 4303.1,3254.04 4303.1,3250.82 4338.11,3215.8 U10.8@4387.61,3215.8 4388,3215.41 v1(4388,3178) ; C31.2@4909.17,3435.17 4938.81,3464.81 4940.26,3464.81 v1(4957.19,3464.81)
  CONNECTION w10: v1(4799.12,3272.49) 4914.63,3388 5096,3388 5138,3346 5272,3346 5370,3444 5370,3472 5276,3566 5042,3566 4957.19,3481.19 v1(4957.19,3464.81)
  Bottom Layer w10: v1(4388,3178) 4704.63,3178 v1(4799.12,3272.49)
VDD_0V9: C9.2 C21.2 C22.2 C23.2 C24.2 C36.2 C40.2 C41.1 L5.1 R13.2 U15.10 U15.51 U15.54 U15.55 U15.67 U15.71 U15.82 U15.103 U15.115 U15.116 | length 3866.6
  Top Layer w6.2: U15.51@5052.24,3420.88 5053.42,3420.88 5064.75,3432.2 5072.27,3432.2 5074.48,3430 5096,3430 5100.38,3425.62 5100.38,3410.56 U15.54@5081.47,3391.65 U15.55@5091.21,3381.9 5119.31,3410 5195.23,3410 ccw(c5196.51,3419) 5197.78,3410 5203.29,3410 ; U15.10@5091.21,3845.84 5092.4,3845.84 5103.72,3834.51 5111.25,3834.51 5122.57,3845.84 5137.84,3845.84 5156,3864 5172,3864 5260,3776 5306,3776 5336.86,3806.86 U15.115@5340.78,3806.86 5340.78,3816.78 ; 5258,3284 5258,3289.31 U15.67@5233.6,3313.7 5214,3333.31 5214,3411.24 ; U15.71@5272.57,3352.67 5214,3411.24 ; U15.116@5331.03,3816.61 5331.21,3816.78 5340.78,3816.78 ; 5356.01,3832.01 5340.78,3816.78 ; U15.103@5457.71,3689.93 5501.85,3734.08 5501.85,3759.73 5546,3803.88 5546,3914 5535,3925 ; 5472.5,3390 5449.61,3390 U15.82@5379.75,3459.86 5332.78,3506.83 5300.83,3506.83 5213.24,3419.24 5213.24,3412 5212.25,3411 5203.29,3410 ; 5203.29,3410 5212.76,3410 5214,3411.24
  Top Layer w10: C36.2@5222,3205.46 v1(5258,3241.46) 5258,3284 ; 5356.01,3832.01 C9.2@5434.83,3910.83 ; v1(5406,3930) 5415.65,3930 C9.2@5434.83,3910.83 ; 5472.5,3390 v1(5548,3390) 5554,3390 5576,3368 5638.93,3368 v1(5658.93,3388) ; 5534.22,3927.19 5517.78,3927.19 5516.6,3926 5514,3926 5498.83,3910.83 C9.2@5434.83,3910.83 ; v1(6029.89,3178.05) 6096.05,3178.05 6143.06,3225.06 C40.2@6233.47,3225.06 6233.47,3253 L5.1@6258.93,3278.46 6285.54,3278.46 6315.61,3248.39 R13.2@6315.61,3226.14 6337.47,3248 6363.55,3248 C41.1@6364.93,3246.62
  CONNECTION w10: v1(5406,3930) 5386,3930 5266,3810 5266,3726 5328,3664 5328,3544 5376,3496 5442,3496 v1(5548,3390) ; v1(5658.93,3388) 5658.93,3341.07 5666,3334 5873.94,3334 v1(6029.89,3178.05)
  Bottom Layer w10: C23.2@5185.25,3205.19 5303.73,3205.19 C24.2@5304,3205.46 ; v1(5258,3241.46) 5258,3212.73 C21.2@5265.25,3205.48
WIFI_DN: U6.8 U8.12 | length 372.5
  Top Layer w6.18: v1(6554,3710) 6544,3720 6544,3784 6558,3798 U6.8@6589.07,3798
  Bottom Layer w6.18: U8.12@6530.23,3560.24 6530.23,3621.54 6534.6,3625.91 6538.49,3625.91 6542.86,3630.28 6542.86,3633.9 6538.49,3638.27 6514.82,3638.27 6510.45,3642.64 6510.45,3646.26 6514.82,3650.63 6545.63,3650.63 6550,3655 6550,3658.62 6545.63,3662.99 6534.6,3662.99 6530.23,3667.36 6530.23,3686.23 v1(6554,3710)
WIFI_DP: U6.9 U8.13 | length 372.5
  Top Layer w6.18: v1(6528,3814) 6585.39,3814 U6.9@6589.07,3817.68
  Bottom Layer w6.18: U8.13@6392.43,3560.24 6506,3673.81 6506,3792 v1(6528,3814)
WORK_LED: LED1.1 U15.58 | length 458.1
  Top Layer w6.2: U15.58@5120.44,3352.67 5128.37,3360.6 5128.37,3361.78 5131.77,3365.18 5131.77,3372.71 5132.49,3373.43 5132.49,3387.32 v1(5132.8,3387.63) ; v1(5420,3216) 5449.76,3186.24 LED1.1@5451.46,3186.24
  Bottom Layer w6.2: v1(5132.8,3387.63) 5141.68,3396.52 5141.68,3398 5149.57,3405.89 5164.43,3405.89 5172.32,3398 5238,3398 v1(5420,3216)
pads on no net: FPC1.1 FPC1.2 FPC1.3 FPC1.4 FPC1.6 SW5.2 SW5.3 U1.1 U1.4 U1.5 U1.12 U1.13 U1.15 U1.16 U1.17 U8.2 U8.3 U8.5 U8.6 U8.7 U8.8 U8.9 U8.10 U8.15 U8.16 U8.17 U8.18 U8.19 U8.20 U8.21 U8.22 U15.4 U15.6 U15.8 U15.9 U15.19 U15.35 U15.36 U15.60 U15.62 U15.63 U15.64 U15.65 U15.75 U15.76 U15.119 USB1.3 USB1.9

## Polygon pours and split planes (outlines as drawn)
GND on Top Layer (solid, remove dead copper, pour order 2): 3190,4180 7338,4180 7338,3050 3190,3050
GND on Bottom Layer (solid, remove dead copper, pour order 12): 3000,4236 7218,4236 7218,3000 3000,3000
GND on 内层1 (solid, remove dead copper): 3034.06,4156.62 7182.06,4156.62 7182.06,3026.62 3034.06,3026.62
GND on CONNECTION (solid, remove dead copper): 3130.83,4193.49 7278.83,4193.49 7278.83,3063.49 3130.83,3063.49
GND on IO_PINS (solid, remove dead copper): 3105.82,4164.62 7253.82,4164.62 7253.82,3034.62 3105.82,3034.62
GND on Top Layer (solid, remove dead copper, pour order 0): 6481,3158.25 6614,3158.25 6614,3136 6481,3136
GND on Bottom Layer (solid, remove dead copper, pour order 4): 6051.54,3476 6051.54,3527.54 6070,3546 6070,3476

## Keep-outs
Board Outline Layer:
  region: 3217.96,3681.68 3752.06,3681.68 3752.06,3545.8 3217.96,3545.8
  region: 3217.96,3681.68 3752.06,3681.68 3752.06,3545.8 3217.96,3545.8
  lines w0.1: 3217.96,3545.8 3752.06,3545.8 3752.06,3681.68 3217.96,3681.68 3217.96,3545.8
  lines w10: 3228,3122.14 6771.9,3122.14 6771.9,3359.23 7165.01,3359.23 7165.01,3869.86 6771.31,3869.86 6771.31,4106 3228,4106 3228,3122.14

## Other copper
Top Layer:
  region net GND: 5075.97,3258.93 5073.71,3251.93 ccw(c5076.34,3233.56) 5063.21,3246.68 5065.47,3264.18 ccw(c5078.6,3277.31)
CONNECTION:
  region net VCC_3V3: 5978.99,3346.06 5986.06,3338.99 5984.92,3337.65 5983.91,3336.11 5983.16,3334.62 5982.84,3333.45 5973.45,3342.84 5974.62,3343.16 5976.11,3343.91 5977.65,3344.92
Bottom Layer:
  region net VCC_5V: 6744.99,3624.06 6752.06,3616.99 6750.92,3615.65 6749.91,3614.11 6749.16,3612.62 6748.84,3611.45 6739.45,3620.84 6740.62,3621.16 6742.11,3621.91 6743.65,3622.92
  region net VCC_5V: 6515.86,3322.07 6520.96,3331.11 ccw(c6536.87,3352.33) 6536.87,3325.81 6521.16,3306.16 ccw(c6494.64,3306.16)

## Silkscreen, mask and mechanical layers (free items; w line width, h text height)
Mechanical Layer:
  lines w0.1: 3217.96,3545.8 3752.06,3545.8 3752.06,3681.68 3217.96,3681.68 3217.96,3545.8